# EAGLE board Qwiic_Grideye-Panel_v10 (EAGLE 7.7.0), part 1 of 4
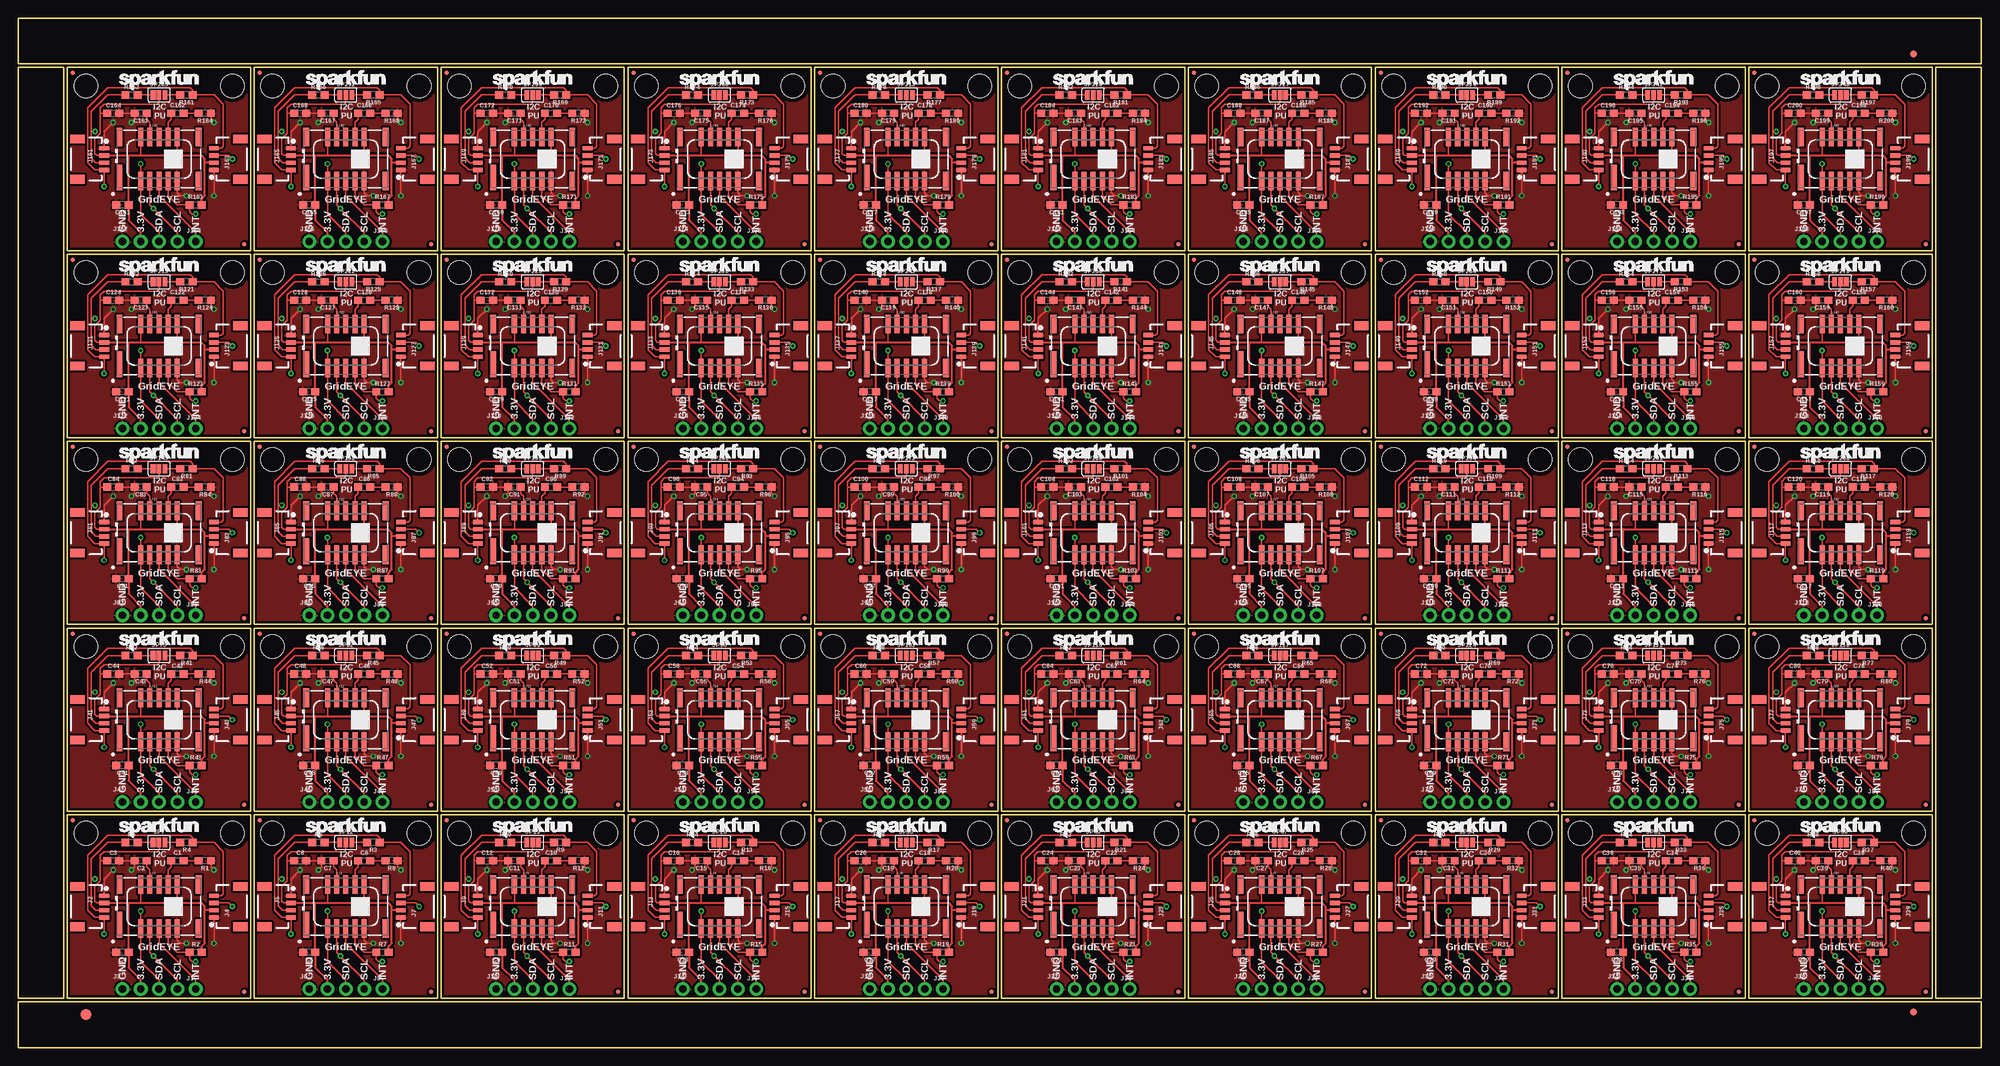
[diagram p0: board, top side]
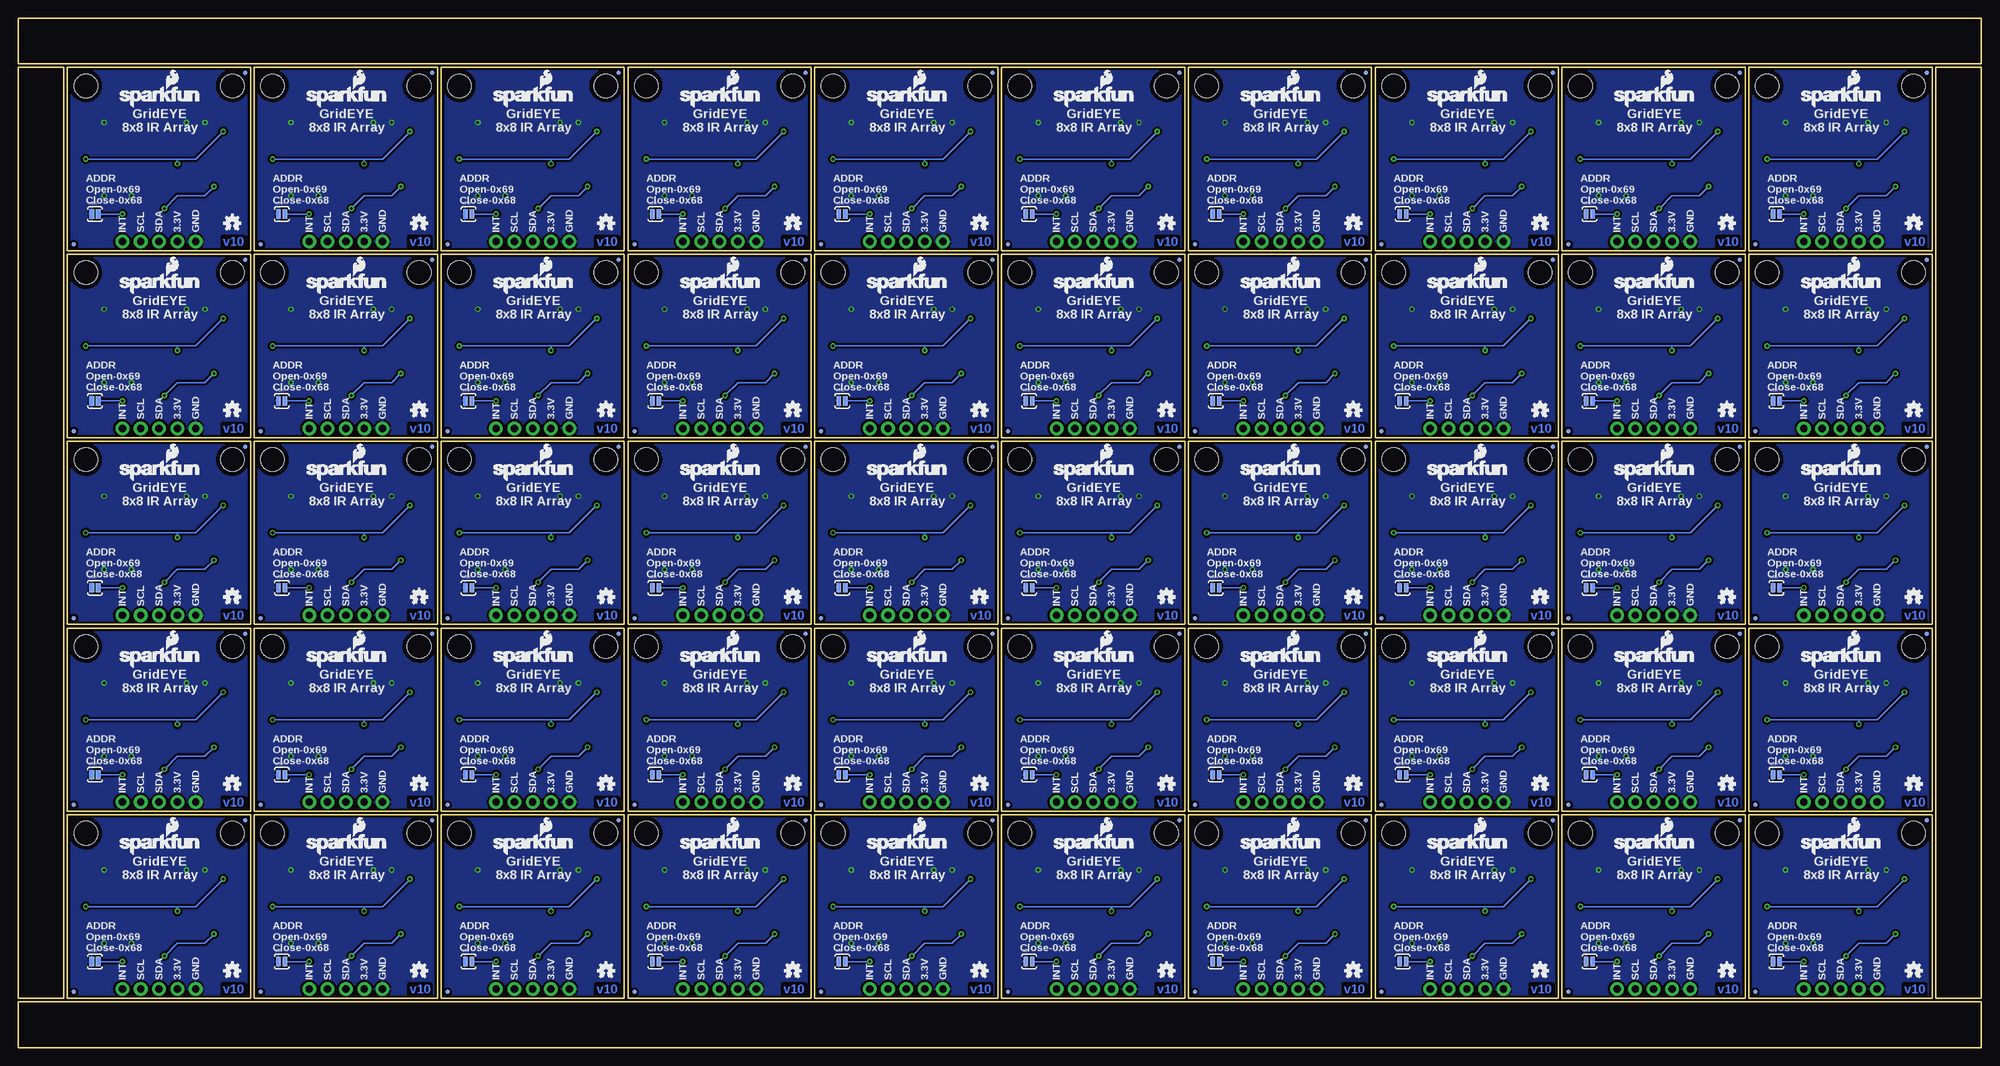
[diagram p1: board, bottom side, seen from below]

Size 272.29 x 142.75 mm. Coordinates in mm from the lower left corner, seen from the top.
Outline: 224 segments
Copper layers (1*16): Top 0.035mm / dielectric 1.5mm / Bottom 0.035mm
Design rules "SparkFun-2-layer-TIGHT": minimum track width 7mil, minimum drill 15mil, track to track 7mil, track to pad 7mil, pad to pad 7mil, via to via 7mil, smd to smd 7mil, copper to edge 7mil, drill to drill 7mil, minimum pad ring 7mil, minimum via ring 7mil, stop-mask expansion 4mil, vias tented up to drill 25mil, thermal gap 10mil

## Footprints (pad centres in the part's own frame; a part is rotated, then mirrored left to right if it is on the bottom)
0603 = smd 1.1 x 1: 1 -0.85,0; 2 0.85,0
FIDUCIAL-1.5X3 = smd 1.5 x 1.5: 1 0,0
FIDUCIAL-1X2 = smd 1 x 1: 1 0,0
1X01_NO_SILK = drill 1.016 pad 1.88: 1 0,0
1X04_1MM_RA = smd 0.6 x 1.35: 1 -1.5,0; 2 -0.5,0; 3 0.5,0; 4 1.5,0 | smd 1.2 x 2: NC1 2.8,-3.675; NC2 -2.8,-3.675
1X04_NO_SILK = drill 1.016 pad 1.88: 1 0,0; 2 2.54,0; 3 5.08,0; 4 7.62,0
MICRO-FIDUCIAL = smd 0.635 x 0.635: 1 0,0
STAND-OFF = hole 3.302: 0,0
SMT-JUMPER_3_2-NC_PASTE_SILK = smd 0.635 x 1.27: 1 -0.813,0; 2 0,0; 3 0.813,0
SJ_2S-NO = smd 0.635 x 1.27: 1 -0.45,0; 2 0.45,0
GRIDEYE-AMG88 = smd 0.8 x 3.6: 1 -5.5,-2.55 | smd 0.7 x 2.6: 2 -2.54,-3.05; 3 -1.27,-3.05; 4 0,-3.05; 5 1.27,-3.05; 6 2.54,-3.05; 9 2.54,3.05; 10 1.27,3.05; 11 0,3.05; 12 -1.27,3.05; 13 -2.54,3.05 | smd 0.8 x 2.6: 7 5.5,-3.05; 8 5.5,3.05; 14 -5.5,3.05

## Placement (x,y rotation side)
C1  1.0uF  [0603]  22.1,25.91 0 top
C2  2.2uF  [0603]  17.02,25.91 180 top
C3  10uF  [0603]  13.21,25.91 0 top
C4  0.1uF  [0603]  14.48,13.21 180 top
C5  0.1uF  [0603]  40.39,13.21 180 top
C6  1.0uF  [0603]  48.01,25.91 0 top
C7  2.2uF  [0603]  42.93,25.91 180 top
C8  10uF  [0603]  39.12,25.91 0 top
C9  0.1uF  [0603]  66.29,13.21 180 top
C10  1.0uF  [0603]  73.91,25.91 0 top
C11  2.2uF  [0603]  68.83,25.91 180 top
C12  10uF  [0603]  65.02,25.91 0 top
C13  0.1uF  [0603]  92.2,13.21 180 top
C14  1.0uF  [0603]  99.82,25.91 0 top
C15  2.2uF  [0603]  94.74,25.91 180 top
C16  10uF  [0603]  90.93,25.91 0 top
C17  0.1uF  [0603]  118.11,13.21 180 top
C18  1.0uF  [0603]  125.73,25.91 0 top
C19  2.2uF  [0603]  120.65,25.91 180 top
C20  10uF  [0603]  116.84,25.91 0 top
C21  0.1uF  [0603]  144.02,13.21 180 top
C22  1.0uF  [0603]  151.64,25.91 0 top
C23  2.2uF  [0603]  146.56,25.91 180 top
C24  10uF  [0603]  142.75,25.91 0 top
C25  0.1uF  [0603]  169.93,13.21 180 top
C26  1.0uF  [0603]  177.55,25.91 0 top
C27  2.2uF  [0603]  172.47,25.91 180 top
C28  10uF  [0603]  168.66,25.91 0 top
C29  0.1uF  [0603]  195.83,13.21 180 top
C30  1.0uF  [0603]  203.45,25.91 0 top
C31  2.2uF  [0603]  198.37,25.91 180 top
C32  10uF  [0603]  194.56,25.91 0 top
C33  0.1uF  [0603]  221.74,13.21 180 top
C34  1.0uF  [0603]  229.36,25.91 0 top
C35  2.2uF  [0603]  224.28,25.91 180 top
C36  10uF  [0603]  220.47,25.91 0 top
C37  0.1uF  [0603]  247.65,13.21 180 top
C38  1.0uF  [0603]  255.27,25.91 0 top
C39  2.2uF  [0603]  250.19,25.91 180 top
C40  10uF  [0603]  246.38,25.91 0 top
C41  0.1uF  [0603]  14.48,39.12 180 top
C42  1.0uF  [0603]  22.1,51.82 0 top
C43  2.2uF  [0603]  17.02,51.82 180 top
C44  10uF  [0603]  13.21,51.82 0 top
C45  0.1uF  [0603]  40.39,39.12 180 top
C46  1.0uF  [0603]  48.01,51.82 0 top
C47  2.2uF  [0603]  42.93,51.82 180 top
C48  10uF  [0603]  39.12,51.82 0 top
C49  0.1uF  [0603]  66.29,39.12 180 top
C50  1.0uF  [0603]  73.91,51.82 0 top
C51  2.2uF  [0603]  68.83,51.82 180 top
C52  10uF  [0603]  65.02,51.82 0 top
C53  0.1uF  [0603]  92.2,39.12 180 top
C54  1.0uF  [0603]  99.82,51.82 0 top
C55  2.2uF  [0603]  94.74,51.82 180 top
C56  10uF  [0603]  90.93,51.82 0 top
C57  0.1uF  [0603]  118.11,39.12 180 top
C58  1.0uF  [0603]  125.73,51.82 0 top
C59  2.2uF  [0603]  120.65,51.82 180 top
C60  10uF  [0603]  116.84,51.82 0 top
C61  0.1uF  [0603]  144.02,39.12 180 top
C62  1.0uF  [0603]  151.64,51.82 0 top
C63  2.2uF  [0603]  146.56,51.82 180 top
C64  10uF  [0603]  142.75,51.82 0 top
C65  0.1uF  [0603]  169.93,39.12 180 top
C66  1.0uF  [0603]  177.55,51.82 0 top
C67  2.2uF  [0603]  172.47,51.82 180 top
C68  10uF  [0603]  168.66,51.82 0 top
C69  0.1uF  [0603]  195.83,39.12 180 top
C70  1.0uF  [0603]  203.45,51.82 0 top
C71  2.2uF  [0603]  198.37,51.82 180 top
C72  10uF  [0603]  194.56,51.82 0 top
C73  0.1uF  [0603]  221.74,39.12 180 top
C74  1.0uF  [0603]  229.36,51.82 0 top
C75  2.2uF  [0603]  224.28,51.82 180 top
C76  10uF  [0603]  220.47,51.82 0 top
C77  0.1uF  [0603]  247.65,39.12 180 top
C78  1.0uF  [0603]  255.27,51.82 0 top
C79  2.2uF  [0603]  250.19,51.82 180 top
C80  10uF  [0603]  246.38,51.82 0 top
C81  0.1uF  [0603]  14.48,65.02 180 top
C82  1.0uF  [0603]  22.1,77.72 0 top
C83  2.2uF  [0603]  17.02,77.72 180 top
C84  10uF  [0603]  13.21,77.72 0 top
C85  0.1uF  [0603]  40.39,65.02 180 top
C86  1.0uF  [0603]  48.01,77.72 0 top
C87  2.2uF  [0603]  42.93,77.72 180 top
C88  10uF  [0603]  39.12,77.72 0 top
C89  0.1uF  [0603]  66.29,65.02 180 top
C90  1.0uF  [0603]  73.91,77.72 0 top
C91  2.2uF  [0603]  68.83,77.72 180 top
C92  10uF  [0603]  65.02,77.72 0 top
C93  0.1uF  [0603]  92.2,65.02 180 top
C94  1.0uF  [0603]  99.82,77.72 0 top
C95  2.2uF  [0603]  94.74,77.72 180 top
C96  10uF  [0603]  90.93,77.72 0 top
C97  0.1uF  [0603]  118.11,65.02 180 top
C98  1.0uF  [0603]  125.73,77.72 0 top
C99  2.2uF  [0603]  120.65,77.72 180 top
C100  10uF  [0603]  116.84,77.72 0 top
C101  0.1uF  [0603]  144.02,65.02 180 top
C102  1.0uF  [0603]  151.64,77.72 0 top
C103  2.2uF  [0603]  146.56,77.72 180 top
C104  10uF  [0603]  142.75,77.72 0 top
C105  0.1uF  [0603]  169.93,65.02 180 top
C106  1.0uF  [0603]  177.55,77.72 0 top
C107  2.2uF  [0603]  172.47,77.72 180 top
C108  10uF  [0603]  168.66,77.72 0 top
C109  0.1uF  [0603]  195.83,65.02 180 top
C110  1.0uF  [0603]  203.45,77.72 0 top
C111  2.2uF  [0603]  198.37,77.72 180 top
C112  10uF  [0603]  194.56,77.72 0 top
C113  0.1uF  [0603]  221.74,65.02 180 top
C114  1.0uF  [0603]  229.36,77.72 0 top
C115  2.2uF  [0603]  224.28,77.72 180 top
C116  10uF  [0603]  220.47,77.72 0 top
C117  0.1uF  [0603]  247.65,65.02 180 top
C118  1.0uF  [0603]  255.27,77.72 0 top
C119  2.2uF  [0603]  250.19,77.72 180 top
C120  10uF  [0603]  246.38,77.72 0 top
C121  0.1uF  [0603]  14.48,90.93 180 top
C122  1.0uF  [0603]  22.1,103.63 0 top
C123  2.2uF  [0603]  17.02,103.63 180 top
C124  10uF  [0603]  13.21,103.63 0 top
C125  0.1uF  [0603]  40.39,90.93 180 top
C126  1.0uF  [0603]  48.01,103.63 0 top
C127  2.2uF  [0603]  42.93,103.63 180 top
C128  10uF  [0603]  39.12,103.63 0 top
C129  0.1uF  [0603]  66.29,90.93 180 top
C130  1.0uF  [0603]  73.91,103.63 0 top
C131  2.2uF  [0603]  68.83,103.63 180 top
C132  10uF  [0603]  65.02,103.63 0 top
C133  0.1uF  [0603]  92.2,90.93 180 top
C134  1.0uF  [0603]  99.82,103.63 0 top
C135  2.2uF  [0603]  94.74,103.63 180 top
C136  10uF  [0603]  90.93,103.63 0 top
C137  0.1uF  [0603]  118.11,90.93 180 top
C138  1.0uF  [0603]  125.73,103.63 0 top
C139  2.2uF  [0603]  120.65,103.63 180 top
C140  10uF  [0603]  116.84,103.63 0 top
C141  0.1uF  [0603]  144.02,90.93 180 top
C142  1.0uF  [0603]  151.64,103.63 0 top
C143  2.2uF  [0603]  146.56,103.63 180 top
C144  10uF  [0603]  142.75,103.63 0 top
C145  0.1uF  [0603]  169.93,90.93 180 top
C146  1.0uF  [0603]  177.55,103.63 0 top
C147  2.2uF  [0603]  172.47,103.63 180 top
C148  10uF  [0603]  168.66,103.63 0 top
C149  0.1uF  [0603]  195.83,90.93 180 top
C150  1.0uF  [0603]  203.45,103.63 0 top
C151  2.2uF  [0603]  198.37,103.63 180 top
C152  10uF  [0603]  194.56,103.63 0 top
C153  0.1uF  [0603]  221.74,90.93 180 top
C154  1.0uF  [0603]  229.36,103.63 0 top
C155  2.2uF  [0603]  224.28,103.63 180 top
C156  10uF  [0603]  220.47,103.63 0 top
C157  0.1uF  [0603]  247.65,90.93 180 top
C158  1.0uF  [0603]  255.27,103.63 0 top
C159  2.2uF  [0603]  250.19,103.63 180 top
C160  10uF  [0603]  246.38,103.63 0 top
C161  0.1uF  [0603]  14.48,116.84 180 top
C162  1.0uF  [0603]  22.1,129.54 0 top
C163  2.2uF  [0603]  17.02,129.54 180 top
C164  10uF  [0603]  13.21,129.54 0 top
C165  0.1uF  [0603]  40.39,116.84 180 top
C166  1.0uF  [0603]  48.01,129.54 0 top
C167  2.2uF  [0603]  42.93,129.54 180 top
C168  10uF  [0603]  39.12,129.54 0 top
C169  0.1uF  [0603]  66.29,116.84 180 top
C170  1.0uF  [0603]  73.91,129.54 0 top
C171  2.2uF  [0603]  68.83,129.54 180 top
C172  10uF  [0603]  65.02,129.54 0 top
C173  0.1uF  [0603]  92.2,116.84 180 top
C174  1.0uF  [0603]  99.82,129.54 0 top
C175  2.2uF  [0603]  94.74,129.54 180 top
C176  10uF  [0603]  90.93,129.54 0 top
C177  0.1uF  [0603]  118.11,116.84 180 top
C178  1.0uF  [0603]  125.73,129.54 0 top
C179  2.2uF  [0603]  120.65,129.54 180 top
C180  10uF  [0603]  116.84,129.54 0 top
C181  0.1uF  [0603]  144.02,116.84 180 top
C182  1.0uF  [0603]  151.64,129.54 0 top
C183  2.2uF  [0603]  146.56,129.54 180 top
C184  10uF  [0603]  142.75,129.54 0 top
C185  0.1uF  [0603]  169.93,116.84 180 top
C186  1.0uF  [0603]  177.55,129.54 0 top
C187  2.2uF  [0603]  172.47,129.54 180 top
C188  10uF  [0603]  168.66,129.54 0 top
C189  0.1uF  [0603]  195.83,116.84 180 top
C190  1.0uF  [0603]  203.45,129.54 0 top
C191  2.2uF  [0603]  198.37,129.54 180 top
C192  10uF  [0603]  194.56,129.54 0 top
C193  0.1uF  [0603]  221.74,116.84 180 top
C194  1.0uF  [0603]  229.36,129.54 0 top
C195  2.2uF  [0603]  224.28,129.54 180 top
C196  10uF  [0603]  220.47,129.54 0 top
C197  0.1uF  [0603]  247.65,116.84 180 top
C198  1.0uF  [0603]  255.27,129.54 0 top
C199  2.2uF  [0603]  250.19,129.54 180 top
C200  10uF  [0603]  246.38,129.54 0 top
E$1  [FIDUCIAL-1.5X3]  9.4,4.57 0 top
E$5  [FIDUCIAL-1X2]  262.89,137.79 90 top
E$8  [FIDUCIAL-1X2]  262.89,4.95 90 top
J1  [1X01_NO_SILK]  24.64,8.13 0 top
J2  SMD  [1X04_1MM_RA]  11.94,19.56 270 top
J3  PTH  [1X04_NO_SILK]  14.48,8.13 0 top
J4  SMD  [1X04_1MM_RA]  27.18,19.56 90 top
J5  SMD  [1X04_1MM_RA]  37.85,19.56 270 top
J6  PTH  [1X04_NO_SILK]  40.39,8.13 0 top
J7  SMD  [1X04_1MM_RA]  53.09,19.56 90 top
J8  [1X01_NO_SILK]  50.55,8.13 0 top
J9  SMD  [1X04_1MM_RA]  63.75,19.56 270 top
J10  PTH  [1X04_NO_SILK]  66.29,8.13 0 top
J11  SMD  [1X04_1MM_RA]  78.99,19.56 90 top
J12  [1X01_NO_SILK]  76.45,8.13 0 top
J13  SMD  [1X04_1MM_RA]  89.66,19.56 270 top
J14  PTH  [1X04_NO_SILK]  92.2,8.13 0 top
J15  SMD  [1X04_1MM_RA]  104.9,19.56 90 top
J16  [1X01_NO_SILK]  102.36,8.13 0 top
J17  SMD  [1X04_1MM_RA]  115.57,19.56 270 top
J18  PTH  [1X04_NO_SILK]  118.11,8.13 0 top
J19  SMD  [1X04_1MM_RA]  130.81,19.56 90 top
J20  [1X01_NO_SILK]  128.27,8.13 0 top
J21  SMD  [1X04_1MM_RA]  141.48,19.56 270 top
J22  PTH  [1X04_NO_SILK]  144.02,8.13 0 top
J23  SMD  [1X04_1MM_RA]  156.72,19.56 90 top
J24  [1X01_NO_SILK]  154.18,8.13 0 top
J25  SMD  [1X04_1MM_RA]  167.39,19.56 270 top
J26  PTH  [1X04_NO_SILK]  169.93,8.13 0 top
J27  SMD  [1X04_1MM_RA]  182.63,19.56 90 top
J28  [1X01_NO_SILK]  180.09,8.13 0 top
J29  SMD  [1X04_1MM_RA]  193.29,19.56 270 top
J30  PTH  [1X04_NO_SILK]  195.83,8.13 0 top
J31  SMD  [1X04_1MM_RA]  208.53,19.56 90 top
J32  [1X01_NO_SILK]  205.99,8.13 0 top
J33  SMD  [1X04_1MM_RA]  219.2,19.56 270 top
J34  PTH  [1X04_NO_SILK]  221.74,8.13 0 top
J35  SMD  [1X04_1MM_RA]  234.44,19.56 90 top
J36  [1X01_NO_SILK]  231.9,8.13 0 top
J37  SMD  [1X04_1MM_RA]  245.11,19.56 270 top
J38  PTH  [1X04_NO_SILK]  247.65,8.13 0 top
J39  SMD  [1X04_1MM_RA]  260.35,19.56 90 top
J40  [1X01_NO_SILK]  257.81,8.13 0 top
J41  SMD  [1X04_1MM_RA]  11.94,45.47 270 top
J42  PTH  [1X04_NO_SILK]  14.48,34.04 0 top
J43  SMD  [1X04_1MM_RA]  27.18,45.47 90 top
J44  [1X01_NO_SILK]  24.64,34.04 0 top
J45  SMD  [1X04_1MM_RA]  37.85,45.47 270 top
J46  PTH  [1X04_NO_SILK]  40.39,34.04 0 top
J47  SMD  [1X04_1MM_RA]  53.09,45.47 90 top
J48  [1X01_NO_SILK]  50.55,34.04 0 top
J49  SMD  [1X04_1MM_RA]  63.75,45.47 270 top
J50  PTH  [1X04_NO_SILK]  66.29,34.04 0 top
J51  SMD  [1X04_1MM_RA]  78.99,45.47 90 top
J52  [1X01_NO_SILK]  76.45,34.04 0 top
J53  SMD  [1X04_1MM_RA]  89.66,45.47 270 top
J54  PTH  [1X04_NO_SILK]  92.2,34.04 0 top
J55  SMD  [1X04_1MM_RA]  104.9,45.47 90 top
J56  [1X01_NO_SILK]  102.36,34.04 0 top
J57  SMD  [1X04_1MM_RA]  115.57,45.47 270 top
J58  PTH  [1X04_NO_SILK]  118.11,34.04 0 top
J59  SMD  [1X04_1MM_RA]  130.81,45.47 90 top
J60  [1X01_NO_SILK]  128.27,34.04 0 top
J61  SMD  [1X04_1MM_RA]  141.48,45.47 270 top
J62  PTH  [1X04_NO_SILK]  144.02,34.04 0 top
J63  SMD  [1X04_1MM_RA]  156.72,45.47 90 top
J64  [1X01_NO_SILK]  154.18,34.04 0 top
J65  SMD  [1X04_1MM_RA]  167.39,45.47 270 top
J66  PTH  [1X04_NO_SILK]  169.93,34.04 0 top
J67  SMD  [1X04_1MM_RA]  182.63,45.47 90 top
J68  [1X01_NO_SILK]  180.09,34.04 0 top
J69  SMD  [1X04_1MM_RA]  193.29,45.47 270 top
J70  PTH  [1X04_NO_SILK]  195.83,34.04 0 top
J71  SMD  [1X04_1MM_RA]  208.53,45.47 90 top
J72  [1X01_NO_SILK]  205.99,34.04 0 top
J73  SMD  [1X04_1MM_RA]  219.2,45.47 270 top
J74  PTH  [1X04_NO_SILK]  221.74,34.04 0 top
J75  SMD  [1X04_1MM_RA]  234.44,45.47 90 top
J76  [1X01_NO_SILK]  231.9,34.04 0 top
J77  SMD  [1X04_1MM_RA]  245.11,45.47 270 top
J78  PTH  [1X04_NO_SILK]  247.65,34.04 0 top
J79  SMD  [1X04_1MM_RA]  260.35,45.47 90 top
J80  [1X01_NO_SILK]  257.81,34.04 0 top
J81  SMD  [1X04_1MM_RA]  11.94,71.37 270 top
J82  PTH  [1X04_NO_SILK]  14.48,59.94 0 top
J83  SMD  [1X04_1MM_RA]  27.18,71.37 90 top
J84  [1X01_NO_SILK]  24.64,59.94 0 top
J85  SMD  [1X04_1MM_RA]  37.85,71.37 270 top
J86  PTH  [1X04_NO_SILK]  40.39,59.94 0 top
J87  SMD  [1X04_1MM_RA]  53.09,71.37 90 top
J88  [1X01_NO_SILK]  50.55,59.94 0 top
J89  SMD  [1X04_1MM_RA]  63.75,71.37 270 top
J90  PTH  [1X04_NO_SILK]  66.29,59.94 0 top
J91  SMD  [1X04_1MM_RA]  78.99,71.37 90 top
J92  [1X01_NO_SILK]  76.45,59.94 0 top
J93  SMD  [1X04_1MM_RA]  89.66,71.37 270 top
J94  PTH  [1X04_NO_SILK]  92.2,59.94 0 top
J95  SMD  [1X04_1MM_RA]  104.9,71.37 90 top
J96  [1X01_NO_SILK]  102.36,59.94 0 top
J97  SMD  [1X04_1MM_RA]  115.57,71.37 270 top
J98  PTH  [1X04_NO_SILK]  118.11,59.94 0 top
J99  SMD  [1X04_1MM_RA]  130.81,71.37 90 top
J100  [1X01_NO_SILK]  128.27,59.94 0 top
J101  SMD  [1X04_1MM_RA]  141.48,71.37 270 top
J102  PTH  [1X04_NO_SILK]  144.02,59.94 0 top
J103  SMD  [1X04_1MM_RA]  156.72,71.37 90 top
J104  [1X01_NO_SILK]  154.18,59.94 0 top
J105  SMD  [1X04_1MM_RA]  167.39,71.37 270 top
J106  PTH  [1X04_NO_SILK]  169.93,59.94 0 top
J107  SMD  [1X04_1MM_RA]  182.63,71.37 90 top
J108  [1X01_NO_SILK]  180.09,59.94 0 top
J109  SMD  [1X04_1MM_RA]  193.29,71.37 270 top
J110  PTH  [1X04_NO_SILK]  195.83,59.94 0 top
J111  SMD  [1X04_1MM_RA]  208.53,71.37 90 top
J112  [1X01_NO_SILK]  205.99,59.94 0 top
J113  SMD  [1X04_1MM_RA]  219.2,71.37 270 top
J114  PTH  [1X04_NO_SILK]  221.74,59.94 0 top
J115  SMD  [1X04_1MM_RA]  234.44,71.37 90 top
J116  [1X01_NO_SILK]  231.9,59.94 0 top
J117  SMD  [1X04_1MM_RA]  245.11,71.37 270 top
J118  PTH  [1X04_NO_SILK]  247.65,59.94 0 top
J119  SMD  [1X04_1MM_RA]  260.35,71.37 90 top
J120  [1X01_NO_SILK]  257.81,59.94 0 top
J121  SMD  [1X04_1MM_RA]  11.94,97.28 270 top
J122  PTH  [1X04_NO_SILK]  14.48,85.85 0 top
J123  SMD  [1X04_1MM_RA]  27.18,97.28 90 top
J124  [1X01_NO_SILK]  24.64,85.85 0 top
J125  SMD  [1X04_1MM_RA]  37.85,97.28 270 top
J126  PTH  [1X04_NO_SILK]  40.39,85.85 0 top
J127  SMD  [1X04_1MM_RA]  53.09,97.28 90 top
J128  [1X01_NO_SILK]  50.55,85.85 0 top
J129  SMD  [1X04_1MM_RA]  63.75,97.28 270 top
J130  PTH  [1X04_NO_SILK]  66.29,85.85 0 top
J131  SMD  [1X04_1MM_RA]  78.99,97.28 90 top
J132  [1X01_NO_SILK]  76.45,85.85 0 top
J133  SMD  [1X04_1MM_RA]  89.66,97.28 270 top
J134  PTH  [1X04_NO_SILK]  92.2,85.85 0 top
J135  SMD  [1X04_1MM_RA]  104.9,97.28 90 top
J136  [1X01_NO_SILK]  102.36,85.85 0 top
J137  SMD  [1X04_1MM_RA]  115.57,97.28 270 top
J138  PTH  [1X04_NO_SILK]  118.11,85.85 0 top
J139  SMD  [1X04_1MM_RA]  130.81,97.28 90 top
J140  [1X01_NO_SILK]  128.27,85.85 0 top
J141  SMD  [1X04_1MM_RA]  141.48,97.28 270 top
J142  PTH  [1X04_NO_SILK]  144.02,85.85 0 top
J143  SMD  [1X04_1MM_RA]  156.72,97.28 90 top
J144  [1X01_NO_SILK]  154.18,85.85 0 top
J145  SMD  [1X04_1MM_RA]  167.39,97.28 270 top
J146  PTH  [1X04_NO_SILK]  169.93,85.85 0 top
J147  SMD  [1X04_1MM_RA]  182.63,97.28 90 top
J148  [1X01_NO_SILK]  180.09,85.85 0 top
J149  SMD  [1X04_1MM_RA]  193.29,97.28 270 top
J150  PTH  [1X04_NO_SILK]  195.83,85.85 0 top
J151  SMD  [1X04_1MM_RA]  208.53,97.28 90 top
J152  [1X01_NO_SILK]  205.99,85.85 0 top
J153  SMD  [1X04_1MM_RA]  219.2,97.28 270 top
J154  PTH  [1X04_NO_SILK]  221.74,85.85 0 top
J155  SMD  [1X04_1MM_RA]  234.44,97.28 90 top
J156  [1X01_NO_SILK]  231.9,85.85 0 top
J157  SMD  [1X04_1MM_RA]  245.11,97.28 270 top
J158  PTH  [1X04_NO_SILK]  247.65,85.85 0 top
J159  SMD  [1X04_1MM_RA]  260.35,97.28 90 top
J160  [1X01_NO_SILK]  257.81,85.85 0 top
J161  SMD  [1X04_1MM_RA]  11.94,123.19 270 top
J162  PTH  [1X04_NO_SILK]  14.48,111.76 0 top
J163  SMD  [1X04_1MM_RA]  27.18,123.19 90 top
J164  [1X01_NO_SILK]  24.64,111.76 0 top
J165  SMD  [1X04_1MM_RA]  37.85,123.19 270 top
J166  PTH  [1X04_NO_SILK]  40.39,111.76 0 top
J167  SMD  [1X04_1MM_RA]  53.09,123.19 90 top
J168  [1X01_NO_SILK]  50.55,111.76 0 top
J169  SMD  [1X04_1MM_RA]  63.75,123.19 270 top
J170  PTH  [1X04_NO_SILK]  66.29,111.76 0 top
J171  SMD  [1X04_1MM_RA]  78.99,123.19 90 top
J172  [1X01_NO_SILK]  76.45,111.76 0 top
J173  SMD  [1X04_1MM_RA]  89.66,123.19 270 top
J174  PTH  [1X04_NO_SILK]  92.2,111.76 0 top
J175  SMD  [1X04_1MM_RA]  104.9,123.19 90 top
J176  [1X01_NO_SILK]  102.36,111.76 0 top
J177  SMD  [1X04_1MM_RA]  115.57,123.19 270 top
J178  PTH  [1X04_NO_SILK]  118.11,111.76 0 top
J179  SMD  [1X04_1MM_RA]  130.81,123.19 90 top
J180  [1X01_NO_SILK]  128.27,111.76 0 top
J181  SMD  [1X04_1MM_RA]  141.48,123.19 270 top
J182  PTH  [1X04_NO_SILK]  144.02,111.76 0 top
J183  SMD  [1X04_1MM_RA]  156.72,123.19 90 top
J184  [1X01_NO_SILK]  154.18,111.76 0 top
J185  SMD  [1X04_1MM_RA]  167.39,123.19 270 top
J186  PTH  [1X04_NO_SILK]  169.93,111.76 0 top
J187  SMD  [1X04_1MM_RA]  182.63,123.19 90 top
J188  [1X01_NO_SILK]  180.09,111.76 0 top
J189  SMD  [1X04_1MM_RA]  193.29,123.19 270 top
J190  PTH  [1X04_NO_SILK]  195.83,111.76 0 top
J191  SMD  [1X04_1MM_RA]  208.53,123.19 90 top
J192  [1X01_NO_SILK]  205.99,111.76 0 top
J193  SMD  [1X04_1MM_RA]  219.2,123.19 270 top
J194  PTH  [1X04_NO_SILK]  221.74,111.76 0 top
J195  SMD  [1X04_1MM_RA]  234.44,123.19 90 top
J196  [1X01_NO_SILK]  231.9,111.76 0 top
J197  SMD  [1X04_1MM_RA]  245.11,123.19 270 top
J198  PTH  [1X04_NO_SILK]  247.65,111.76 0 top
J199  SMD  [1X04_1MM_RA]  260.35,123.19 90 top
J200  [1X01_NO_SILK]  257.81,111.76 0 top
JP1  FIDUCIALUFIDUCIAL  [MICRO-FIDUCIAL]  31.37,7.75 0 bottom
JP2  FIDUCIALUFIDUCIAL  [MICRO-FIDUCIAL]  31.37,7.75 0 top
JP3  STAND-OFF  [STAND-OFF]  9.4,29.72 0 top
JP4  STAND-OFF  [STAND-OFF]  29.72,29.72 0 top
JP5  FIDUCIALUFIDUCIAL  [MICRO-FIDUCIAL]  7.62,31.5 0 bottom
JP6  FIDUCIALUFIDUCIAL  [MICRO-FIDUCIAL]  7.62,31.5 0 top
JP7  [SMT-JUMPER_3_2-NC_PASTE_SILK]  19.56,28.45 0 top
JP8  STAND-OFF  [STAND-OFF]  35.31,29.72 0 top
JP9  STAND-OFF  [STAND-OFF]  55.63,29.72 0 top
JP10  FIDUCIALUFIDUCIAL  [MICRO-FIDUCIAL]  57.28,7.75 0 top
JP11  FIDUCIALUFIDUCIAL  [MICRO-FIDUCIAL]  33.53,31.5 0 top
JP12  [SMT-JUMPER_3_2-NC_PASTE_SILK]  45.47,28.45 0 top
JP13  FIDUCIALUFIDUCIAL  [MICRO-FIDUCIAL]  57.28,7.75 0 bottom
JP14  FIDUCIALUFIDUCIAL  [MICRO-FIDUCIAL]  33.53,31.5 0 bottom
JP15  STAND-OFF  [STAND-OFF]  61.21,29.72 0 top
JP16  STAND-OFF  [STAND-OFF]  81.53,29.72 0 top
JP17  FIDUCIALUFIDUCIAL  [MICRO-FIDUCIAL]  83.19,7.75 0 top
JP18  FIDUCIALUFIDUCIAL  [MICRO-FIDUCIAL]  59.44,31.5 0 top
JP19  [SMT-JUMPER_3_2-NC_PASTE_SILK]  71.37,28.45 0 top
JP20  FIDUCIALUFIDUCIAL  [MICRO-FIDUCIAL]  83.19,7.75 0 bottom
JP21  FIDUCIALUFIDUCIAL  [MICRO-FIDUCIAL]  59.44,31.5 0 bottom
JP22  STAND-OFF  [STAND-OFF]  87.12,29.72 0 top
JP23  STAND-OFF  [STAND-OFF]  107.44,29.72 0 top
JP24  FIDUCIALUFIDUCIAL  [MICRO-FIDUCIAL]  109.09,7.75 0 top
JP25  FIDUCIALUFIDUCIAL  [MICRO-FIDUCIAL]  85.34,31.5 0 top
JP26  [SMT-JUMPER_3_2-NC_PASTE_SILK]  97.28,28.45 0 top
JP27  FIDUCIALUFIDUCIAL  [MICRO-FIDUCIAL]  109.09,7.75 0 bottom
JP28  FIDUCIALUFIDUCIAL  [MICRO-FIDUCIAL]  85.34,31.5 0 bottom
JP29  STAND-OFF  [STAND-OFF]  113.03,29.72 0 top
JP30  STAND-OFF  [STAND-OFF]  133.35,29.72 0 top
JP31  FIDUCIALUFIDUCIAL  [MICRO-FIDUCIAL]  135,7.75 0 top
JP32  FIDUCIALUFIDUCIAL  [MICRO-FIDUCIAL]  111.25,31.5 0 top
JP33  [SMT-JUMPER_3_2-NC_PASTE_SILK]  123.19,28.45 0 top
JP34  FIDUCIALUFIDUCIAL  [MICRO-FIDUCIAL]  135,7.75 0 bottom
JP35  FIDUCIALUFIDUCIAL  [MICRO-FIDUCIAL]  111.25,31.5 0 bottom
JP36  STAND-OFF  [STAND-OFF]  138.94,29.72 0 top
JP37  STAND-OFF  [STAND-OFF]  159.26,29.72 0 top
JP38  FIDUCIALUFIDUCIAL  [MICRO-FIDUCIAL]  160.91,7.75 0 top
JP39  FIDUCIALUFIDUCIAL  [MICRO-FIDUCIAL]  137.16,31.5 0 top
JP40  [SMT-JUMPER_3_2-NC_PASTE_SILK]  149.1,28.45 0 top
JP41  FIDUCIALUFIDUCIAL  [MICRO-FIDUCIAL]  160.91,7.75 0 bottom
JP42  FIDUCIALUFIDUCIAL  [MICRO-FIDUCIAL]  137.16,31.5 0 bottom
JP43  STAND-OFF  [STAND-OFF]  164.85,29.72 0 top
JP44  STAND-OFF  [STAND-OFF]  185.17,29.72 0 top
JP45  FIDUCIALUFIDUCIAL  [MICRO-FIDUCIAL]  186.82,7.75 0 top
JP46  FIDUCIALUFIDUCIAL  [MICRO-FIDUCIAL]  163.07,31.5 0 top
JP47  [SMT-JUMPER_3_2-NC_PASTE_SILK]  175.01,28.45 0 top
JP48  FIDUCIALUFIDUCIAL  [MICRO-FIDUCIAL]  186.82,7.75 0 bottom
JP49  FIDUCIALUFIDUCIAL  [MICRO-FIDUCIAL]  163.07,31.5 0 bottom
JP50  STAND-OFF  [STAND-OFF]  190.75,29.72 0 top
JP51  STAND-OFF  [STAND-OFF]  211.07,29.72 0 top
JP52  FIDUCIALUFIDUCIAL  [MICRO-FIDUCIAL]  212.72,7.75 0 top
JP53  FIDUCIALUFIDUCIAL  [MICRO-FIDUCIAL]  188.98,31.5 0 top
JP54  [SMT-JUMPER_3_2-NC_PASTE_SILK]  200.91,28.45 0 top
JP55  FIDUCIALUFIDUCIAL  [MICRO-FIDUCIAL]  212.72,7.75 0 bottom
JP56  FIDUCIALUFIDUCIAL  [MICRO-FIDUCIAL]  188.98,31.5 0 bottom
JP57  STAND-OFF  [STAND-OFF]  216.66,29.72 0 top
JP58  STAND-OFF  [STAND-OFF]  236.98,29.72 0 top
JP59  FIDUCIALUFIDUCIAL  [MICRO-FIDUCIAL]  238.63,7.75 0 top
JP60  FIDUCIALUFIDUCIAL  [MICRO-FIDUCIAL]  214.88,31.5 0 top
JP61  [SMT-JUMPER_3_2-NC_PASTE_SILK]  226.82,28.45 0 top
JP62  FIDUCIALUFIDUCIAL  [MICRO-FIDUCIAL]  238.63,7.75 0 bottom
JP63  FIDUCIALUFIDUCIAL  [MICRO-FIDUCIAL]  214.88,31.5 0 bottom
JP64  STAND-OFF  [STAND-OFF]  242.57,29.72 0 top
JP65  STAND-OFF  [STAND-OFF]  262.89,29.72 0 top
JP66  FIDUCIALUFIDUCIAL  [MICRO-FIDUCIAL]  264.54,7.75 0 top
JP67  FIDUCIALUFIDUCIAL  [MICRO-FIDUCIAL]  240.79,31.5 0 top
JP68  [SMT-JUMPER_3_2-NC_PASTE_SILK]  252.73,28.45 0 top
JP69  FIDUCIALUFIDUCIAL  [MICRO-FIDUCIAL]  264.54,7.75 0 bottom
JP70  FIDUCIALUFIDUCIAL  [MICRO-FIDUCIAL]  240.79,31.5 0 bottom
JP71  STAND-OFF  [STAND-OFF]  9.4,55.63 0 top
JP72  STAND-OFF  [STAND-OFF]  29.72,55.63 0 top
JP73  FIDUCIALUFIDUCIAL  [MICRO-FIDUCIAL]  31.37,33.66 0 top
JP74  FIDUCIALUFIDUCIAL  [MICRO-FIDUCIAL]  7.62,57.4 0 top
JP75  [SMT-JUMPER_3_2-NC_PASTE_SILK]  19.56,54.36 0 top
JP76  FIDUCIALUFIDUCIAL  [MICRO-FIDUCIAL]  31.37,33.66 0 bottom
JP77  FIDUCIALUFIDUCIAL  [MICRO-FIDUCIAL]  7.62,57.4 0 bottom
JP78  STAND-OFF  [STAND-OFF]  35.31,55.63 0 top
JP79  STAND-OFF  [STAND-OFF]  55.63,55.63 0 top
JP80  FIDUCIALUFIDUCIAL  [MICRO-FIDUCIAL]  57.28,33.66 0 top
JP81  FIDUCIALUFIDUCIAL  [MICRO-FIDUCIAL]  33.53,57.4 0 top
JP82  [SMT-JUMPER_3_2-NC_PASTE_SILK]  45.47,54.36 0 top
JP83  FIDUCIALUFIDUCIAL  [MICRO-FIDUCIAL]  57.28,33.66 0 bottom
JP84  FIDUCIALUFIDUCIAL  [MICRO-FIDUCIAL]  33.53,57.4 0 bottom
JP85  STAND-OFF  [STAND-OFF]  61.21,55.63 0 top
JP86  STAND-OFF  [STAND-OFF]  81.53,55.63 0 top
JP87  FIDUCIALUFIDUCIAL  [MICRO-FIDUCIAL]  83.19,33.66 0 top
JP88  FIDUCIALUFIDUCIAL  [MICRO-FIDUCIAL]  59.44,57.4 0 top
JP89  [SMT-JUMPER_3_2-NC_PASTE_SILK]  71.37,54.36 0 top
JP90  FIDUCIALUFIDUCIAL  [MICRO-FIDUCIAL]  83.19,33.66 0 bottom
JP91  FIDUCIALUFIDUCIAL  [MICRO-FIDUCIAL]  59.44,57.4 0 bottom
JP92  STAND-OFF  [STAND-OFF]  87.12,55.63 0 top
JP93  STAND-OFF  [STAND-OFF]  107.44,55.63 0 top
JP94  FIDUCIALUFIDUCIAL  [MICRO-FIDUCIAL]  109.09,33.66 0 top
JP95  FIDUCIALUFIDUCIAL  [MICRO-FIDUCIAL]  85.34,57.4 0 top
JP96  [SMT-JUMPER_3_2-NC_PASTE_SILK]  97.28,54.36 0 top
JP97  FIDUCIALUFIDUCIAL  [MICRO-FIDUCIAL]  109.09,33.66 0 bottom
JP98  FIDUCIALUFIDUCIAL  [MICRO-FIDUCIAL]  85.34,57.4 0 bottom
JP99  STAND-OFF  [STAND-OFF]  113.03,55.63 0 top
JP100  STAND-OFF  [STAND-OFF]  133.35,55.63 0 top
JP101  FIDUCIALUFIDUCIAL  [MICRO-FIDUCIAL]  135,33.66 0 top
JP102  FIDUCIALUFIDUCIAL  [MICRO-FIDUCIAL]  111.25,57.4 0 top
JP103  [SMT-JUMPER_3_2-NC_PASTE_SILK]  123.19,54.36 0 top
JP104  FIDUCIALUFIDUCIAL  [MICRO-FIDUCIAL]  135,33.66 0 bottom
JP105  FIDUCIALUFIDUCIAL  [MICRO-FIDUCIAL]  111.25,57.4 0 bottom
JP106  STAND-OFF  [STAND-OFF]  138.94,55.63 0 top
JP107  STAND-OFF  [STAND-OFF]  159.26,55.63 0 top
JP108  FIDUCIALUFIDUCIAL  [MICRO-FIDUCIAL]  160.91,33.66 0 top
JP109  FIDUCIALUFIDUCIAL  [MICRO-FIDUCIAL]  137.16,57.4 0 top
JP110  [SMT-JUMPER_3_2-NC_PASTE_SILK]  149.1,54.36 0 top
JP111  FIDUCIALUFIDUCIAL  [MICRO-FIDUCIAL]  160.91,33.66 0 bottom
JP112  FIDUCIALUFIDUCIAL  [MICRO-FIDUCIAL]  137.16,57.4 0 bottom
JP113  STAND-OFF  [STAND-OFF]  164.85,55.63 0 top
JP114  STAND-OFF  [STAND-OFF]  185.17,55.63 0 top
JP115  FIDUCIALUFIDUCIAL  [MICRO-FIDUCIAL]  186.82,33.66 0 top
JP116  FIDUCIALUFIDUCIAL  [MICRO-FIDUCIAL]  163.07,57.4 0 top
JP117  [SMT-JUMPER_3_2-NC_PASTE_SILK]  175.01,54.36 0 top
JP118  FIDUCIALUFIDUCIAL  [MICRO-FIDUCIAL]  186.82,33.66 0 bottom
JP119  FIDUCIALUFIDUCIAL  [MICRO-FIDUCIAL]  163.07,57.4 0 bottom
JP120  STAND-OFF  [STAND-OFF]  190.75,55.63 0 top
JP121  STAND-OFF  [STAND-OFF]  211.07,55.63 0 top
JP122  FIDUCIALUFIDUCIAL  [MICRO-FIDUCIAL]  212.72,33.66 0 top
JP123  FIDUCIALUFIDUCIAL  [MICRO-FIDUCIAL]  188.98,57.4 0 top
JP124  [SMT-JUMPER_3_2-NC_PASTE_SILK]  200.91,54.36 0 top
JP125  FIDUCIALUFIDUCIAL  [MICRO-FIDUCIAL]  212.72,33.66 0 bottom
JP126  FIDUCIALUFIDUCIAL  [MICRO-FIDUCIAL]  188.98,57.4 0 bottom
JP127  STAND-OFF  [STAND-OFF]  216.66,55.63 0 top
JP128  STAND-OFF  [STAND-OFF]  236.98,55.63 0 top
JP129  FIDUCIALUFIDUCIAL  [MICRO-FIDUCIAL]  238.63,33.66 0 top
JP130  FIDUCIALUFIDUCIAL  [MICRO-FIDUCIAL]  214.88,57.4 0 top
JP131  [SMT-JUMPER_3_2-NC_PASTE_SILK]  226.82,54.36 0 top
JP132  FIDUCIALUFIDUCIAL  [MICRO-FIDUCIAL]  238.63,33.66 0 bottom
JP133  FIDUCIALUFIDUCIAL  [MICRO-FIDUCIAL]  214.88,57.4 0 bottom
JP134  STAND-OFF  [STAND-OFF]  242.57,55.63 0 top
JP135  STAND-OFF  [STAND-OFF]  262.89,55.63 0 top
JP136  FIDUCIALUFIDUCIAL  [MICRO-FIDUCIAL]  264.54,33.66 0 top
JP137  FIDUCIALUFIDUCIAL  [MICRO-FIDUCIAL]  240.79,57.4 0 top
JP138  [SMT-JUMPER_3_2-NC_PASTE_SILK]  252.73,54.36 0 top
JP139  FIDUCIALUFIDUCIAL  [MICRO-FIDUCIAL]  264.54,33.66 0 bottom
JP140  FIDUCIALUFIDUCIAL  [MICRO-FIDUCIAL]  240.79,57.4 0 bottom
JP141  STAND-OFF  [STAND-OFF]  9.4,81.53 0 top
JP142  STAND-OFF  [STAND-OFF]  29.72,81.53 0 top
JP143  FIDUCIALUFIDUCIAL  [MICRO-FIDUCIAL]  31.37,59.56 0 top
JP144  FIDUCIALUFIDUCIAL  [MICRO-FIDUCIAL]  7.62,83.31 0 top
JP145  [SMT-JUMPER_3_2-NC_PASTE_SILK]  19.56,80.26 0 top
JP146  FIDUCIALUFIDUCIAL  [MICRO-FIDUCIAL]  31.37,59.56 0 bottom
JP147  FIDUCIALUFIDUCIAL  [MICRO-FIDUCIAL]  7.62,83.31 0 bottom
JP148  STAND-OFF  [STAND-OFF]  35.31,81.53 0 top
JP149  STAND-OFF  [STAND-OFF]  55.63,81.53 0 top
JP150  FIDUCIALUFIDUCIAL  [MICRO-FIDUCIAL]  57.28,59.56 0 top
JP151  FIDUCIALUFIDUCIAL  [MICRO-FIDUCIAL]  33.53,83.31 0 top
JP152  [SMT-JUMPER_3_2-NC_PASTE_SILK]  45.47,80.26 0 top
JP153  FIDUCIALUFIDUCIAL  [MICRO-FIDUCIAL]  57.28,59.56 0 bottom
JP154  FIDUCIALUFIDUCIAL  [MICRO-FIDUCIAL]  33.53,83.31 0 bottom
JP155  STAND-OFF  [STAND-OFF]  61.21,81.53 0 top
JP156  STAND-OFF  [STAND-OFF]  81.53,81.53 0 top
JP157  FIDUCIALUFIDUCIAL  [MICRO-FIDUCIAL]  83.19,59.56 0 top
JP158  FIDUCIALUFIDUCIAL  [MICRO-FIDUCIAL]  59.44,83.31 0 top
JP159  [SMT-JUMPER_3_2-NC_PASTE_SILK]  71.37,80.26 0 top
JP160  FIDUCIALUFIDUCIAL  [MICRO-FIDUCIAL]  83.19,59.56 0 bottom
JP161  FIDUCIALUFIDUCIAL  [MICRO-FIDUCIAL]  59.44,83.31 0 bottom
JP162  STAND-OFF  [STAND-OFF]  87.12,81.53 0 top
JP163  STAND-OFF  [STAND-OFF]  107.44,81.53 0 top
JP164  FIDUCIALUFIDUCIAL  [MICRO-FIDUCIAL]  109.09,59.56 0 top
JP165  FIDUCIALUFIDUCIAL  [MICRO-FIDUCIAL]  85.34,83.31 0 top
JP166  [SMT-JUMPER_3_2-NC_PASTE_SILK]  97.28,80.26 0 top
JP167  FIDUCIALUFIDUCIAL  [MICRO-FIDUCIAL]  109.09,59.56 0 bottom
JP168  FIDUCIALUFIDUCIAL  [MICRO-FIDUCIAL]  85.34,83.31 0 bottom
JP169  STAND-OFF  [STAND-OFF]  113.03,81.53 0 top
JP170  STAND-OFF  [STAND-OFF]  133.35,81.53 0 top
JP171  FIDUCIALUFIDUCIAL  [MICRO-FIDUCIAL]  135,59.56 0 top
JP172  FIDUCIALUFIDUCIAL  [MICRO-FIDUCIAL]  111.25,83.31 0 top
JP173  [SMT-JUMPER_3_2-NC_PASTE_SILK]  123.19,80.26 0 top
JP174  FIDUCIALUFIDUCIAL  [MICRO-FIDUCIAL]  135,59.56 0 bottom
JP175  FIDUCIALUFIDUCIAL  [MICRO-FIDUCIAL]  111.25,83.31 0 bottom
JP176  STAND-OFF  [STAND-OFF]  138.94,81.53 0 top
JP177  STAND-OFF  [STAND-OFF]  159.26,81.53 0 top
JP178  FIDUCIALUFIDUCIAL  [MICRO-FIDUCIAL]  160.91,59.56 0 top
JP179  FIDUCIALUFIDUCIAL  [MICRO-FIDUCIAL]  137.16,83.31 0 top
JP180  [SMT-JUMPER_3_2-NC_PASTE_SILK]  149.1,80.26 0 top
JP181  FIDUCIALUFIDUCIAL  [MICRO-FIDUCIAL]  160.91,59.56 0 bottom
JP182  FIDUCIALUFIDUCIAL  [MICRO-FIDUCIAL]  137.16,83.31 0 bottom
JP183  STAND-OFF  [STAND-OFF]  164.85,81.53 0 top
JP184  STAND-OFF  [STAND-OFF]  185.17,81.53 0 top
JP185  FIDUCIALUFIDUCIAL  [MICRO-FIDUCIAL]  186.82,59.56 0 top
JP186  FIDUCIALUFIDUCIAL  [MICRO-FIDUCIAL]  163.07,83.31 0 top
JP187  [SMT-JUMPER_3_2-NC_PASTE_SILK]  175.01,80.26 0 top
JP188  FIDUCIALUFIDUCIAL  [MICRO-FIDUCIAL]  186.82,59.56 0 bottom
JP189  FIDUCIALUFIDUCIAL  [MICRO-FIDUCIAL]  163.07,83.31 0 bottom
JP190  STAND-OFF  [STAND-OFF]  190.75,81.53 0 top
JP191  STAND-OFF  [STAND-OFF]  211.07,81.53 0 top
JP192  FIDUCIALUFIDUCIAL  [MICRO-FIDUCIAL]  212.72,59.56 0 top
JP193  FIDUCIALUFIDUCIAL  [MICRO-FIDUCIAL]  188.98,83.31 0 top
JP194  [SMT-JUMPER_3_2-NC_PASTE_SILK]  200.91,80.26 0 top
JP195  FIDUCIALUFIDUCIAL  [MICRO-FIDUCIAL]  212.72,59.56 0 bottom
JP196  FIDUCIALUFIDUCIAL  [MICRO-FIDUCIAL]  188.98,83.31 0 bottom
JP197  STAND-OFF  [STAND-OFF]  216.66,81.53 0 top
JP198  STAND-OFF  [STAND-OFF]  236.98,81.53 0 top
JP199  FIDUCIALUFIDUCIAL  [MICRO-FIDUCIAL]  238.63,59.56 0 top
JP200  FIDUCIALUFIDUCIAL  [MICRO-FIDUCIAL]  214.88,83.31 0 top
JP201  [SMT-JUMPER_3_2-NC_PASTE_SILK]  226.82,80.26 0 top
JP202  FIDUCIALUFIDUCIAL  [MICRO-FIDUCIAL]  238.63,59.56 0 bottom
JP203  FIDUCIALUFIDUCIAL  [MICRO-FIDUCIAL]  214.88,83.31 0 bottom
JP204  STAND-OFF  [STAND-OFF]  242.57,81.53 0 top
JP205  STAND-OFF  [STAND-OFF]  262.89,81.53 0 top
JP206  FIDUCIALUFIDUCIAL  [MICRO-FIDUCIAL]  264.54,59.56 0 top
JP207  FIDUCIALUFIDUCIAL  [MICRO-FIDUCIAL]  240.79,83.31 0 top
JP208  [SMT-JUMPER_3_2-NC_PASTE_SILK]  252.73,80.26 0 top
JP209  FIDUCIALUFIDUCIAL  [MICRO-FIDUCIAL]  264.54,59.56 0 bottom
JP210  FIDUCIALUFIDUCIAL  [MICRO-FIDUCIAL]  240.79,83.31 0 bottom
JP211  STAND-OFF  [STAND-OFF]  9.4,107.44 0 top
JP212  STAND-OFF  [STAND-OFF]  29.72,107.44 0 top
JP213  FIDUCIALUFIDUCIAL  [MICRO-FIDUCIAL]  31.37,85.47 0 top
JP214  FIDUCIALUFIDUCIAL  [MICRO-FIDUCIAL]  7.62,109.22 0 top
JP215  [SMT-JUMPER_3_2-NC_PASTE_SILK]  19.56,106.17 0 top
JP216  FIDUCIALUFIDUCIAL  [MICRO-FIDUCIAL]  31.37,85.47 0 bottom
JP217  FIDUCIALUFIDUCIAL  [MICRO-FIDUCIAL]  7.62,109.22 0 bottom
JP218  STAND-OFF  [STAND-OFF]  35.31,107.44 0 top
JP219  STAND-OFF  [STAND-OFF]  55.63,107.44 0 top
JP220  FIDUCIALUFIDUCIAL  [MICRO-FIDUCIAL]  57.28,85.47 0 top
JP221  FIDUCIALUFIDUCIAL  [MICRO-FIDUCIAL]  33.53,109.22 0 top
JP222  [SMT-JUMPER_3_2-NC_PASTE_SILK]  45.47,106.17 0 top
JP223  FIDUCIALUFIDUCIAL  [MICRO-FIDUCIAL]  57.28,85.47 0 bottom
JP224  FIDUCIALUFIDUCIAL  [MICRO-FIDUCIAL]  33.53,109.22 0 bottom
JP225  STAND-OFF  [STAND-OFF]  61.21,107.44 0 top
JP226  STAND-OFF  [STAND-OFF]  81.53,107.44 0 top
JP227  FIDUCIALUFIDUCIAL  [MICRO-FIDUCIAL]  83.19,85.47 0 top
JP228  FIDUCIALUFIDUCIAL  [MICRO-FIDUCIAL]  59.44,109.22 0 top
JP229  [SMT-JUMPER_3_2-NC_PASTE_SILK]  71.37,106.17 0 top
JP230  FIDUCIALUFIDUCIAL  [MICRO-FIDUCIAL]  83.19,85.47 0 bottom
JP231  FIDUCIALUFIDUCIAL  [MICRO-FIDUCIAL]  59.44,109.22 0 bottom
JP232  STAND-OFF  [STAND-OFF]  87.12,107.44 0 top
JP233  STAND-OFF  [STAND-OFF]  107.44,107.44 0 top
JP234  FIDUCIALUFIDUCIAL  [MICRO-FIDUCIAL]  109.09,85.47 0 top
JP235  FIDUCIALUFIDUCIAL  [MICRO-FIDUCIAL]  85.34,109.22 0 top
JP236  [SMT-JUMPER_3_2-NC_PASTE_SILK]  97.28,106.17 0 top
JP237  FIDUCIALUFIDUCIAL  [MICRO-FIDUCIAL]  109.09,85.47 0 bottom
JP238  FIDUCIALUFIDUCIAL  [MICRO-FIDUCIAL]  85.34,109.22 0 bottom
JP239  STAND-OFF  [STAND-OFF]  113.03,107.44 0 top
JP240  STAND-OFF  [STAND-OFF]  133.35,107.44 0 top
JP241  FIDUCIALUFIDUCIAL  [MICRO-FIDUCIAL]  135,85.47 0 top
JP242  FIDUCIALUFIDUCIAL  [MICRO-FIDUCIAL]  111.25,109.22 0 top
JP243  [SMT-JUMPER_3_2-NC_PASTE_SILK]  123.19,106.17 0 top
JP244  FIDUCIALUFIDUCIAL  [MICRO-FIDUCIAL]  135,85.47 0 bottom
JP245  FIDUCIALUFIDUCIAL  [MICRO-FIDUCIAL]  111.25,109.22 0 bottom
JP246  STAND-OFF  [STAND-OFF]  138.94,107.44 0 top
JP247  STAND-OFF  [STAND-OFF]  159.26,107.44 0 top
JP248  FIDUCIALUFIDUCIAL  [MICRO-FIDUCIAL]  160.91,85.47 0 top
JP249  FIDUCIALUFIDUCIAL  [MICRO-FIDUCIAL]  137.16,109.22 0 top
JP250  [SMT-JUMPER_3_2-NC_PASTE_SILK]  149.1,106.17 0 top
JP251  FIDUCIALUFIDUCIAL  [MICRO-FIDUCIAL]  160.91,85.47 0 bottom
JP252  FIDUCIALUFIDUCIAL  [MICRO-FIDUCIAL]  137.16,109.22 0 bottom
JP253  STAND-OFF  [STAND-OFF]  164.85,107.44 0 top
JP254  STAND-OFF  [STAND-OFF]  185.17,107.44 0 top
JP255  FIDUCIALUFIDUCIAL  [MICRO-FIDUCIAL]  186.82,85.47 0 top
JP256  FIDUCIALUFIDUCIAL  [MICRO-FIDUCIAL]  163.07,109.22 0 top
JP257  [SMT-JUMPER_3_2-NC_PASTE_SILK]  175.01,106.17 0 top
JP258  FIDUCIALUFIDUCIAL  [MICRO-FIDUCIAL]  186.82,85.47 0 bottom
JP259  FIDUCIALUFIDUCIAL  [MICRO-FIDUCIAL]  163.07,109.22 0 bottom
JP260  STAND-OFF  [STAND-OFF]  190.75,107.44 0 top
JP261  STAND-OFF  [STAND-OFF]  211.07,107.44 0 top
JP262  FIDUCIALUFIDUCIAL  [MICRO-FIDUCIAL]  212.72,85.47 0 top
JP263  FIDUCIALUFIDUCIAL  [MICRO-FIDUCIAL]  188.98,109.22 0 top
JP264  [SMT-JUMPER_3_2-NC_PASTE_SILK]  200.91,106.17 0 top
JP265  FIDUCIALUFIDUCIAL  [MICRO-FIDUCIAL]  212.72,85.47 0 bottom
JP266  FIDUCIALUFIDUCIAL  [MICRO-FIDUCIAL]  188.98,109.22 0 bottom
JP267  STAND-OFF  [STAND-OFF]  216.66,107.44 0 top
JP268  STAND-OFF  [STAND-OFF]  236.98,107.44 0 top
JP269  FIDUCIALUFIDUCIAL  [MICRO-FIDUCIAL]  238.63,85.47 0 top
JP270  FIDUCIALUFIDUCIAL  [MICRO-FIDUCIAL]  214.88,109.22 0 top
JP271  [SMT-JUMPER_3_2-NC_PASTE_SILK]  226.82,106.17 0 top
JP272  FIDUCIALUFIDUCIAL  [MICRO-FIDUCIAL]  238.63,85.47 0 bottom
JP273  FIDUCIALUFIDUCIAL  [MICRO-FIDUCIAL]  214.88,109.22 0 bottom
JP274  STAND-OFF  [STAND-OFF]  242.57,107.44 0 top
JP275  STAND-OFF  [STAND-OFF]  262.89,107.44 0 top
JP276  FIDUCIALUFIDUCIAL  [MICRO-FIDUCIAL]  264.54,85.47 0 top
JP277  FIDUCIALUFIDUCIAL  [MICRO-FIDUCIAL]  240.79,109.22 0 top
JP278  [SMT-JUMPER_3_2-NC_PASTE_SILK]  252.73,106.17 0 top
JP279  FIDUCIALUFIDUCIAL  [MICRO-FIDUCIAL]  264.54,85.47 0 bottom
JP280  FIDUCIALUFIDUCIAL  [MICRO-FIDUCIAL]  240.79,109.22 0 bottom
JP281  STAND-OFF  [STAND-OFF]  9.4,133.35 0 top
JP282  STAND-OFF  [STAND-OFF]  29.72,133.35 0 top
JP283  FIDUCIALUFIDUCIAL  [MICRO-FIDUCIAL]  31.37,111.38 0 top
JP284  FIDUCIALUFIDUCIAL  [MICRO-FIDUCIAL]  7.62,135.13 0 top
JP285  [SMT-JUMPER_3_2-NC_PASTE_SILK]  19.56,132.08 0 top
JP286  FIDUCIALUFIDUCIAL  [MICRO-FIDUCIAL]  31.37,111.38 0 bottom
JP287  FIDUCIALUFIDUCIAL  [MICRO-FIDUCIAL]  7.62,135.13 0 bottom
JP288  STAND-OFF  [STAND-OFF]  35.31,133.35 0 top
JP289  STAND-OFF  [STAND-OFF]  55.63,133.35 0 top
JP290  FIDUCIALUFIDUCIAL  [MICRO-FIDUCIAL]  57.28,111.38 0 top
JP291  FIDUCIALUFIDUCIAL  [MICRO-FIDUCIAL]  33.53,135.13 0 top
JP292  [SMT-JUMPER_3_2-NC_PASTE_SILK]  45.47,132.08 0 top
JP293  FIDUCIALUFIDUCIAL  [MICRO-FIDUCIAL]  57.28,111.38 0 bottom
JP294  FIDUCIALUFIDUCIAL  [MICRO-FIDUCIAL]  33.53,135.13 0 bottom
JP295  STAND-OFF  [STAND-OFF]  61.21,133.35 0 top
JP296  STAND-OFF  [STAND-OFF]  81.53,133.35 0 top
JP297  FIDUCIALUFIDUCIAL  [MICRO-FIDUCIAL]  83.19,111.38 0 top
JP298  FIDUCIALUFIDUCIAL  [MICRO-FIDUCIAL]  59.44,135.13 0 top
JP299  [SMT-JUMPER_3_2-NC_PASTE_SILK]  71.37,132.08 0 top
JP300  FIDUCIALUFIDUCIAL  [MICRO-FIDUCIAL]  83.19,111.38 0 bottom
JP301  FIDUCIALUFIDUCIAL  [MICRO-FIDUCIAL]  59.44,135.13 0 bottom
JP302  STAND-OFF  [STAND-OFF]  87.12,133.35 0 top
JP303  STAND-OFF  [STAND-OFF]  107.44,133.35 0 top
JP304  FIDUCIALUFIDUCIAL  [MICRO-FIDUCIAL]  109.09,111.38 0 top
JP305  FIDUCIALUFIDUCIAL  [MICRO-FIDUCIAL]  85.34,135.13 0 top
JP306  [SMT-JUMPER_3_2-NC_PASTE_SILK]  97.28,132.08 0 top
JP307  FIDUCIALUFIDUCIAL  [MICRO-FIDUCIAL]  109.09,111.38 0 bottom
JP308  FIDUCIALUFIDUCIAL  [MICRO-FIDUCIAL]  85.34,135.13 0 bottom
JP309  STAND-OFF  [STAND-OFF]  113.03,133.35 0 top
JP310  STAND-OFF  [STAND-OFF]  133.35,133.35 0 top
JP311  FIDUCIALUFIDUCIAL  [MICRO-FIDUCIAL]  135,111.38 0 top
JP312  FIDUCIALUFIDUCIAL  [MICRO-FIDUCIAL]  111.25,135.13 0 top
JP313  [SMT-JUMPER_3_2-NC_PASTE_SILK]  123.19,132.08 0 top
JP314  FIDUCIALUFIDUCIAL  [MICRO-FIDUCIAL]  135,111.38 0 bottom
JP315  FIDUCIALUFIDUCIAL  [MICRO-FIDUCIAL]  111.25,135.13 0 bottom
JP316  STAND-OFF  [STAND-OFF]  138.94,133.35 0 top
JP317  STAND-OFF  [STAND-OFF]  159.26,133.35 0 top
JP318  FIDUCIALUFIDUCIAL  [MICRO-FIDUCIAL]  160.91,111.38 0 top
JP319  FIDUCIALUFIDUCIAL  [MICRO-FIDUCIAL]  137.16,135.13 0 top
JP320  [SMT-JUMPER_3_2-NC_PASTE_SILK]  149.1,132.08 0 top
JP321  FIDUCIALUFIDUCIAL  [MICRO-FIDUCIAL]  160.91,111.38 0 bottom
JP322  FIDUCIALUFIDUCIAL  [MICRO-FIDUCIAL]  137.16,135.13 0 bottom
JP323  STAND-OFF  [STAND-OFF]  164.85,133.35 0 top
JP324  STAND-OFF  [STAND-OFF]  185.17,133.35 0 top
JP325  FIDUCIALUFIDUCIAL  [MICRO-FIDUCIAL]  186.82,111.38 0 top
JP326  FIDUCIALUFIDUCIAL  [MICRO-FIDUCIAL]  163.07,135.13 0 top
JP327  [SMT-JUMPER_3_2-NC_PASTE_SILK]  175.01,132.08 0 top
JP328  FIDUCIALUFIDUCIAL  [MICRO-FIDUCIAL]  186.82,111.38 0 bottom
JP329  FIDUCIALUFIDUCIAL  [MICRO-FIDUCIAL]  163.07,135.13 0 bottom
JP330  STAND-OFF  [STAND-OFF]  190.75,133.35 0 top
JP331  STAND-OFF  [STAND-OFF]  211.07,133.35 0 top
JP332  FIDUCIALUFIDUCIAL  [MICRO-FIDUCIAL]  212.72,111.38 0 top
JP333  FIDUCIALUFIDUCIAL  [MICRO-FIDUCIAL]  188.98,135.13 0 top
JP334  [SMT-JUMPER_3_2-NC_PASTE_SILK]  200.91,132.08 0 top
JP335  FIDUCIALUFIDUCIAL  [MICRO-FIDUCIAL]  212.72,111.38 0 bottom
JP336  FIDUCIALUFIDUCIAL  [MICRO-FIDUCIAL]  188.98,135.13 0 bottom
JP337  STAND-OFF  [STAND-OFF]  216.66,133.35 0 top
JP338  STAND-OFF  [STAND-OFF]  236.98,133.35 0 top
JP339  FIDUCIALUFIDUCIAL  [MICRO-FIDUCIAL]  238.63,111.38 0 top
JP340  FIDUCIALUFIDUCIAL  [MICRO-FIDUCIAL]  214.88,135.13 0 top
JP341  [SMT-JUMPER_3_2-NC_PASTE_SILK]  226.82,132.08 0 top
JP342  FIDUCIALUFIDUCIAL  [MICRO-FIDUCIAL]  238.63,111.38 0 bottom
JP343  FIDUCIALUFIDUCIAL  [MICRO-FIDUCIAL]  214.88,135.13 0 bottom
JP344  STAND-OFF  [STAND-OFF]  242.57,133.35 0 top
JP345  STAND-OFF  [STAND-OFF]  262.89,133.35 0 top
JP346  FIDUCIALUFIDUCIAL  [MICRO-FIDUCIAL]  264.54,111.38 0 top
JP347  FIDUCIALUFIDUCIAL  [MICRO-FIDUCIAL]  240.79,135.13 0 top
JP348  [SMT-JUMPER_3_2-NC_PASTE_SILK]  252.73,132.08 0 top
JP349  FIDUCIALUFIDUCIAL  [MICRO-FIDUCIAL]  264.54,111.38 0 bottom
JP350  FIDUCIALUFIDUCIAL  [MICRO-FIDUCIAL]  240.79,135.13 0 bottom
LOGO1  OSHW-LOGOMINI  [OSHW-LOGO-MINI]  9.4,10.67 0 bottom
LOGO2  OSHW-LOGOMINI  [OSHW-LOGO-MINI]  35.31,10.67 0 bottom
LOGO3  OSHW-LOGOMINI  [OSHW-LOGO-MINI]  61.21,10.67 0 bottom
LOGO4  OSHW-LOGOMINI  [OSHW-LOGO-MINI]  87.12,10.67 0 bottom
LOGO5  OSHW-LOGOMINI  [OSHW-LOGO-MINI]  113.03,10.67 0 bottom
LOGO6  OSHW-LOGOMINI  [OSHW-LOGO-MINI]  138.94,10.67 0 bottom
LOGO7  OSHW-LOGOMINI  [OSHW-LOGO-MINI]  164.85,10.67 0 bottom
LOGO8  OSHW-LOGOMINI  [OSHW-LOGO-MINI]  190.75,10.67 0 bottom
LOGO9  OSHW-LOGOMINI  [OSHW-LOGO-MINI]  216.66,10.67 0 bottom
LOGO10  OSHW-LOGOMINI  [OSHW-LOGO-MINI]  242.57,10.67 0 bottom
LOGO11  OSHW-LOGOMINI  [OSHW-LOGO-MINI]  9.4,36.58 0 bottom
LOGO12  OSHW-LOGOMINI  [OSHW-LOGO-MINI]  35.31,36.58 0 bottom
LOGO13  OSHW-LOGOMINI  [OSHW-LOGO-MINI]  61.21,36.58 0 bottom
LOGO14  OSHW-LOGOMINI  [OSHW-LOGO-MINI]  87.12,36.58 0 bottom
LOGO15  OSHW-LOGOMINI  [OSHW-LOGO-MINI]  113.03,36.58 0 bottom
LOGO16  OSHW-LOGOMINI  [OSHW-LOGO-MINI]  138.94,36.58 0 bottom
LOGO17  OSHW-LOGOMINI  [OSHW-LOGO-MINI]  164.85,36.58 0 bottom
LOGO18  OSHW-LOGOMINI  [OSHW-LOGO-MINI]  190.75,36.58 0 bottom
LOGO19  OSHW-LOGOMINI  [OSHW-LOGO-MINI]  216.66,36.58 0 bottom
LOGO20  OSHW-LOGOMINI  [OSHW-LOGO-MINI]  242.57,36.58 0 bottom
LOGO21  OSHW-LOGOMINI  [OSHW-LOGO-MINI]  9.4,62.48 0 bottom
LOGO22  OSHW-LOGOMINI  [OSHW-LOGO-MINI]  35.31,62.48 0 bottom
LOGO23  OSHW-LOGOMINI  [OSHW-LOGO-MINI]  61.21,62.48 0 bottom
LOGO24  OSHW-LOGOMINI  [OSHW-LOGO-MINI]  87.12,62.48 0 bottom
LOGO25  OSHW-LOGOMINI  [OSHW-LOGO-MINI]  113.03,62.48 0 bottom
LOGO26  OSHW-LOGOMINI  [OSHW-LOGO-MINI]  138.94,62.48 0 bottom
LOGO27  OSHW-LOGOMINI  [OSHW-LOGO-MINI]  164.85,62.48 0 bottom
LOGO28  OSHW-LOGOMINI  [OSHW-LOGO-MINI]  190.75,62.48 0 bottom
LOGO29  OSHW-LOGOMINI  [OSHW-LOGO-MINI]  216.66,62.48 0 bottom
LOGO30  OSHW-LOGOMINI  [OSHW-LOGO-MINI]  242.57,62.48 0 bottom
LOGO31  OSHW-LOGOMINI  [OSHW-LOGO-MINI]  9.4,88.39 0 bottom
LOGO32  OSHW-LOGOMINI  [OSHW-LOGO-MINI]  35.31,88.39 0 bottom
LOGO33  OSHW-LOGOMINI  [OSHW-LOGO-MINI]  61.21,88.39 0 bottom
LOGO34  OSHW-LOGOMINI  [OSHW-LOGO-MINI]  87.12,88.39 0 bottom
LOGO35  OSHW-LOGOMINI  [OSHW-LOGO-MINI]  113.03,88.39 0 bottom
LOGO36  OSHW-LOGOMINI  [OSHW-LOGO-MINI]  138.94,88.39 0 bottom
LOGO37  OSHW-LOGOMINI  [OSHW-LOGO-MINI]  164.85,88.39 0 bottom
LOGO38  OSHW-LOGOMINI  [OSHW-LOGO-MINI]  190.75,88.39 0 bottom
LOGO39  OSHW-LOGOMINI  [OSHW-LOGO-MINI]  216.66,88.39 0 bottom
LOGO40  OSHW-LOGOMINI  [OSHW-LOGO-MINI]  242.57,88.39 0 bottom
LOGO41  OSHW-LOGOMINI  [OSHW-LOGO-MINI]  9.4,114.3 0 bottom
LOGO42  OSHW-LOGOMINI  [OSHW-LOGO-MINI]  35.31,114.3 0 bottom
LOGO43  OSHW-LOGOMINI  [OSHW-LOGO-MINI]  61.21,114.3 0 bottom
LOGO44  OSHW-LOGOMINI  [OSHW-LOGO-MINI]  87.12,114.3 0 bottom
LOGO45  OSHW-LOGOMINI  [OSHW-LOGO-MINI]  113.03,114.3 0 bottom
LOGO46  OSHW-LOGOMINI  [OSHW-LOGO-MINI]  138.94,114.3 0 bottom
LOGO47  OSHW-LOGOMINI  [OSHW-LOGO-MINI]  164.85,114.3 0 bottom
LOGO48  OSHW-LOGOMINI  [OSHW-LOGO-MINI]  190.75,114.3 0 bottom
LOGO49  OSHW-LOGOMINI  [OSHW-LOGO-MINI]  216.66,114.3 0 bottom
LOGO50  OSHW-LOGOMINI  [OSHW-LOGO-MINI]  242.57,114.3 0 bottom
R1  20  [0603]  25.91,25.91 180 top
R2  10k  [0603]  24.64,13.21 0 top
R3  4.7k  [0603]  49.28,28.45 180 top
R4  4.7k  [0603]  23.37,28.45 180 top
R5  4.7k  [0603]  15.75,28.45 0 top
R6  4.7k  [0603]  41.66,28.45 0 top
R7  10k  [0603]  50.55,13.21 0 top
R8  20  [0603]  51.82,25.91 180 top
R9  4.7k  [0603]  75.18,28.45 180 top
R10  4.7k  [0603]  67.56,28.45 0 top
R11  10k  [0603]  76.45,13.21 0 top
R12  20  [0603]  77.72,25.91 180 top
R13  4.7k  [0603]  101.09,28.45 180 top
R14  4.7k  [0603]  93.47,28.45 0 top
R15  10k  [0603]  102.36,13.21 0 top
R16  20  [0603]  103.63,25.91 180 top
R17  4.7k  [0603]  127,28.45 180 top
R18  4.7k  [0603]  119.38,28.45 0 top
R19  10k  [0603]  128.27,13.21 0 top
R20  20  [0603]  129.54,25.91 180 top
R21  4.7k  [0603]  152.91,28.45 180 top
R22  4.7k  [0603]  145.29,28.45 0 top
R23  10k  [0603]  154.18,13.21 0 top
R24  20  [0603]  155.45,25.91 180 top
R25  4.7k  [0603]  178.82,28.45 180 top
R26  4.7k  [0603]  171.2,28.45 0 top
R27  10k  [0603]  180.09,13.21 0 top
R28  20  [0603]  181.36,25.91 180 top
R29  4.7k  [0603]  204.72,28.45 180 top
R30  4.7k  [0603]  197.1,28.45 0 top
R31  10k  [0603]  205.99,13.21 0 top
R32  20  [0603]  207.26,25.91 180 top
R33  4.7k  [0603]  230.63,28.45 180 top
R34  4.7k  [0603]  223.01,28.45 0 top
R35  10k  [0603]  231.9,13.21 0 top
R36  20  [0603]  233.17,25.91 180 top
R37  4.7k  [0603]  256.54,28.45 180 top
R38  4.7k  [0603]  248.92,28.45 0 top
R39  10k  [0603]  257.81,13.21 0 top
R40  20  [0603]  259.08,25.91 180 top
R41  4.7k  [0603]  23.37,54.36 180 top
R42  4.7k  [0603]  15.75,54.36 0 top
R43  10k  [0603]  24.64,39.12 0 top
R44  20  [0603]  25.91,51.82 180 top
R45  4.7k  [0603]  49.28,54.36 180 top
R46  4.7k  [0603]  41.66,54.36 0 top
R47  10k  [0603]  50.55,39.12 0 top
R48  20  [0603]  51.82,51.82 180 top
R49  4.7k  [0603]  75.18,54.36 180 top
R50  4.7k  [0603]  67.56,54.36 0 top
R51  10k  [0603]  76.45,39.12 0 top
R52  20  [0603]  77.72,51.82 180 top
R53  4.7k  [0603]  101.09,54.36 180 top
R54  4.7k  [0603]  93.47,54.36 0 top
R55  10k  [0603]  102.36,39.12 0 top
R56  20  [0603]  103.63,51.82 180 top
R57  4.7k  [0603]  127,54.36 180 top
R58  4.7k  [0603]  119.38,54.36 0 top
R59  10k  [0603]  128.27,39.12 0 top
R60  20  [0603]  129.54,51.82 180 top
R61  4.7k  [0603]  152.91,54.36 180 top
R62  4.7k  [0603]  145.29,54.36 0 top
R63  10k  [0603]  154.18,39.12 0 top
R64  20  [0603]  155.45,51.82 180 top
R65  4.7k  [0603]  178.82,54.36 180 top
R66  4.7k  [0603]  171.2,54.36 0 top
R67  10k  [0603]  180.09,39.12 0 top
R68  20  [0603]  181.36,51.82 180 top
R69  4.7k  [0603]  204.72,54.36 180 top
R70  4.7k  [0603]  197.1,54.36 0 top
R71  10k  [0603]  205.99,39.12 0 top
R72  20  [0603]  207.26,51.82 180 top
R73  4.7k  [0603]  230.63,54.36 180 top
R74  4.7k  [0603]  223.01,54.36 0 top
R75  10k  [0603]  231.9,39.12 0 top
R76  20  [0603]  233.17,51.82 180 top
R77  4.7k  [0603]  256.54,54.36 180 top
R78  4.7k  [0603]  248.92,54.36 0 top
R79  10k  [0603]  257.81,39.12 0 top
R80  20  [0603]  259.08,51.82 180 top
R81  4.7k  [0603]  23.37,80.26 180 top
R82  4.7k  [0603]  15.75,80.26 0 top
R83  10k  [0603]  24.64,65.02 0 top
R84  20  [0603]  25.91,77.72 180 top
R85  4.7k  [0603]  49.28,80.26 180 top
R86  4.7k  [0603]  41.66,80.26 0 top
R87  10k  [0603]  50.55,65.02 0 top
R88  20  [0603]  51.82,77.72 180 top
R89  4.7k  [0603]  75.18,80.26 180 top
R90  4.7k  [0603]  67.56,80.26 0 top
R91  10k  [0603]  76.45,65.02 0 top
R92  20  [0603]  77.72,77.72 180 top
R93  4.7k  [0603]  101.09,80.26 180 top
R94  4.7k  [0603]  93.47,80.26 0 top
R95  10k  [0603]  102.36,65.02 0 top
R96  20  [0603]  103.63,77.72 180 top
R97  4.7k  [0603]  127,80.26 180 top
R98  4.7k  [0603]  119.38,80.26 0 top
R99  10k  [0603]  128.27,65.02 0 top
R100  20  [0603]  129.54,77.72 180 top
R101  4.7k  [0603]  152.91,80.26 180 top
R102  4.7k  [0603]  145.29,80.26 0 top
R103  10k  [0603]  154.18,65.02 0 top
R104  20  [0603]  155.45,77.72 180 top
R105  4.7k  [0603]  178.82,80.26 180 top
R106  4.7k  [0603]  171.2,80.26 0 top
R107  10k  [0603]  180.09,65.02 0 top
R108  20  [0603]  181.36,77.72 180 top
R109  4.7k  [0603]  204.72,80.26 180 top
R110  4.7k  [0603]  197.1,80.26 0 top
R111  10k  [0603]  205.99,65.02 0 top
R112  20  [0603]  207.26,77.72 180 top
R113  4.7k  [0603]  230.63,80.26 180 top
R114  4.7k  [0603]  223.01,80.26 0 top
R115  10k  [0603]  231.9,65.02 0 top
R116  20  [0603]  233.17,77.72 180 top
R117  4.7k  [0603]  256.54,80.26 180 top
R118  4.7k  [0603]  248.92,80.26 0 top
R119  10k  [0603]  257.81,65.02 0 top
R120  20  [0603]  259.08,77.72 180 top
R121  4.7k  [0603]  23.37,106.17 180 top
R122  4.7k  [0603]  15.75,106.17 0 top
R123  10k  [0603]  24.64,90.93 0 top
R124  20  [0603]  25.91,103.63 180 top
R125  4.7k  [0603]  49.28,106.17 180 top
R126  4.7k  [0603]  41.66,106.17 0 top
R127  10k  [0603]  50.55,90.93 0 top
R128  20  [0603]  51.82,103.63 180 top
R129  4.7k  [0603]  75.18,106.17 180 top
R130  4.7k  [0603]  67.56,106.17 0 top
R131  10k  [0603]  76.45,90.93 0 top
R132  20  [0603]  77.72,103.63 180 top
R133  4.7k  [0603]  101.09,106.17 180 top
R134  4.7k  [0603]  93.47,106.17 0 top
R135  10k  [0603]  102.36,90.93 0 top
R136  20  [0603]  103.63,103.63 180 top
R137  4.7k  [0603]  127,106.17 180 top
R138  4.7k  [0603]  119.38,106.17 0 top
R139  10k  [0603]  128.27,90.93 0 top
R140  20  [0603]  129.54,103.63 180 top
R141  4.7k  [0603]  152.91,106.17 180 top
R142  4.7k  [0603]  145.29,106.17 0 top
R143  10k  [0603]  154.18,90.93 0 top
R144  20  [0603]  155.45,103.63 180 top
R145  4.7k  [0603]  178.82,106.17 180 top
R146  4.7k  [0603]  171.2,106.17 0 top
R147  10k  [0603]  180.09,90.93 0 top
R148  20  [0603]  181.36,103.63 180 top
R149  4.7k  [0603]  204.72,106.17 180 top
R150  4.7k  [0603]  197.1,106.17 0 top
R151  10k  [0603]  205.99,90.93 0 top
R152  20  [0603]  207.26,103.63 180 top
R153  4.7k  [0603]  230.63,106.17 180 top
R154  4.7k  [0603]  223.01,106.17 0 top
R155  10k  [0603]  231.9,90.93 0 top
R156  20  [0603]  233.17,103.63 180 top
R157  4.7k  [0603]  256.54,106.17 180 top
R158  4.7k  [0603]  248.92,106.17 0 top
R159  10k  [0603]  257.81,90.93 0 top
R160  20  [0603]  259.08,103.63 180 top
R161  4.7k  [0603]  23.37,132.08 180 top
R162  4.7k  [0603]  15.75,132.08 0 top
R163  10k  [0603]  24.64,116.84 0 top
R164  20  [0603]  25.91,129.54 180 top
R165  4.7k  [0603]  49.28,132.08 180 top
R166  4.7k  [0603]  41.66,132.08 0 top
R167  10k  [0603]  50.55,116.84 0 top
R168  20  [0603]  51.82,129.54 180 top
R169  4.7k  [0603]  75.18,132.08 180 top
R170  4.7k  [0603]  67.56,132.08 0 top
R171  10k  [0603]  76.45,116.84 0 top
R172  20  [0603]  77.72,129.54 180 top
R173  4.7k  [0603]  101.09,132.08 180 top
R174  4.7k  [0603]  93.47,132.08 0 top
R175  10k  [0603]  102.36,116.84 0 top
R176  20  [0603]  103.63,129.54 180 top
R177  4.7k  [0603]  127,132.08 180 top
R178  4.7k  [0603]  119.38,132.08 0 top
R179  10k  [0603]  128.27,116.84 0 top
R180  20  [0603]  129.54,129.54 180 top
R181  4.7k  [0603]  152.91,132.08 180 top
R182  4.7k  [0603]  145.29,132.08 0 top
R183  10k  [0603]  154.18,116.84 0 top
R184  20  [0603]  155.45,129.54 180 top
R185  4.7k  [0603]  178.82,132.08 180 top
R186  4.7k  [0603]  171.2,132.08 0 top
R187  10k  [0603]  180.09,116.84 0 top
R188  20  [0603]  181.36,129.54 180 top
R189  4.7k  [0603]  204.72,132.08 180 top
R190  4.7k  [0603]  197.1,132.08 0 top
R191  10k  [0603]  205.99,116.84 0 top
R192  20  [0603]  207.26,129.54 180 top
R193  4.7k  [0603]  230.63,132.08 180 top
R194  4.7k  [0603]  223.01,132.08 0 top